# EAGLE board Seeeduino_Arch_V1.0 (EAGLE 6.4)
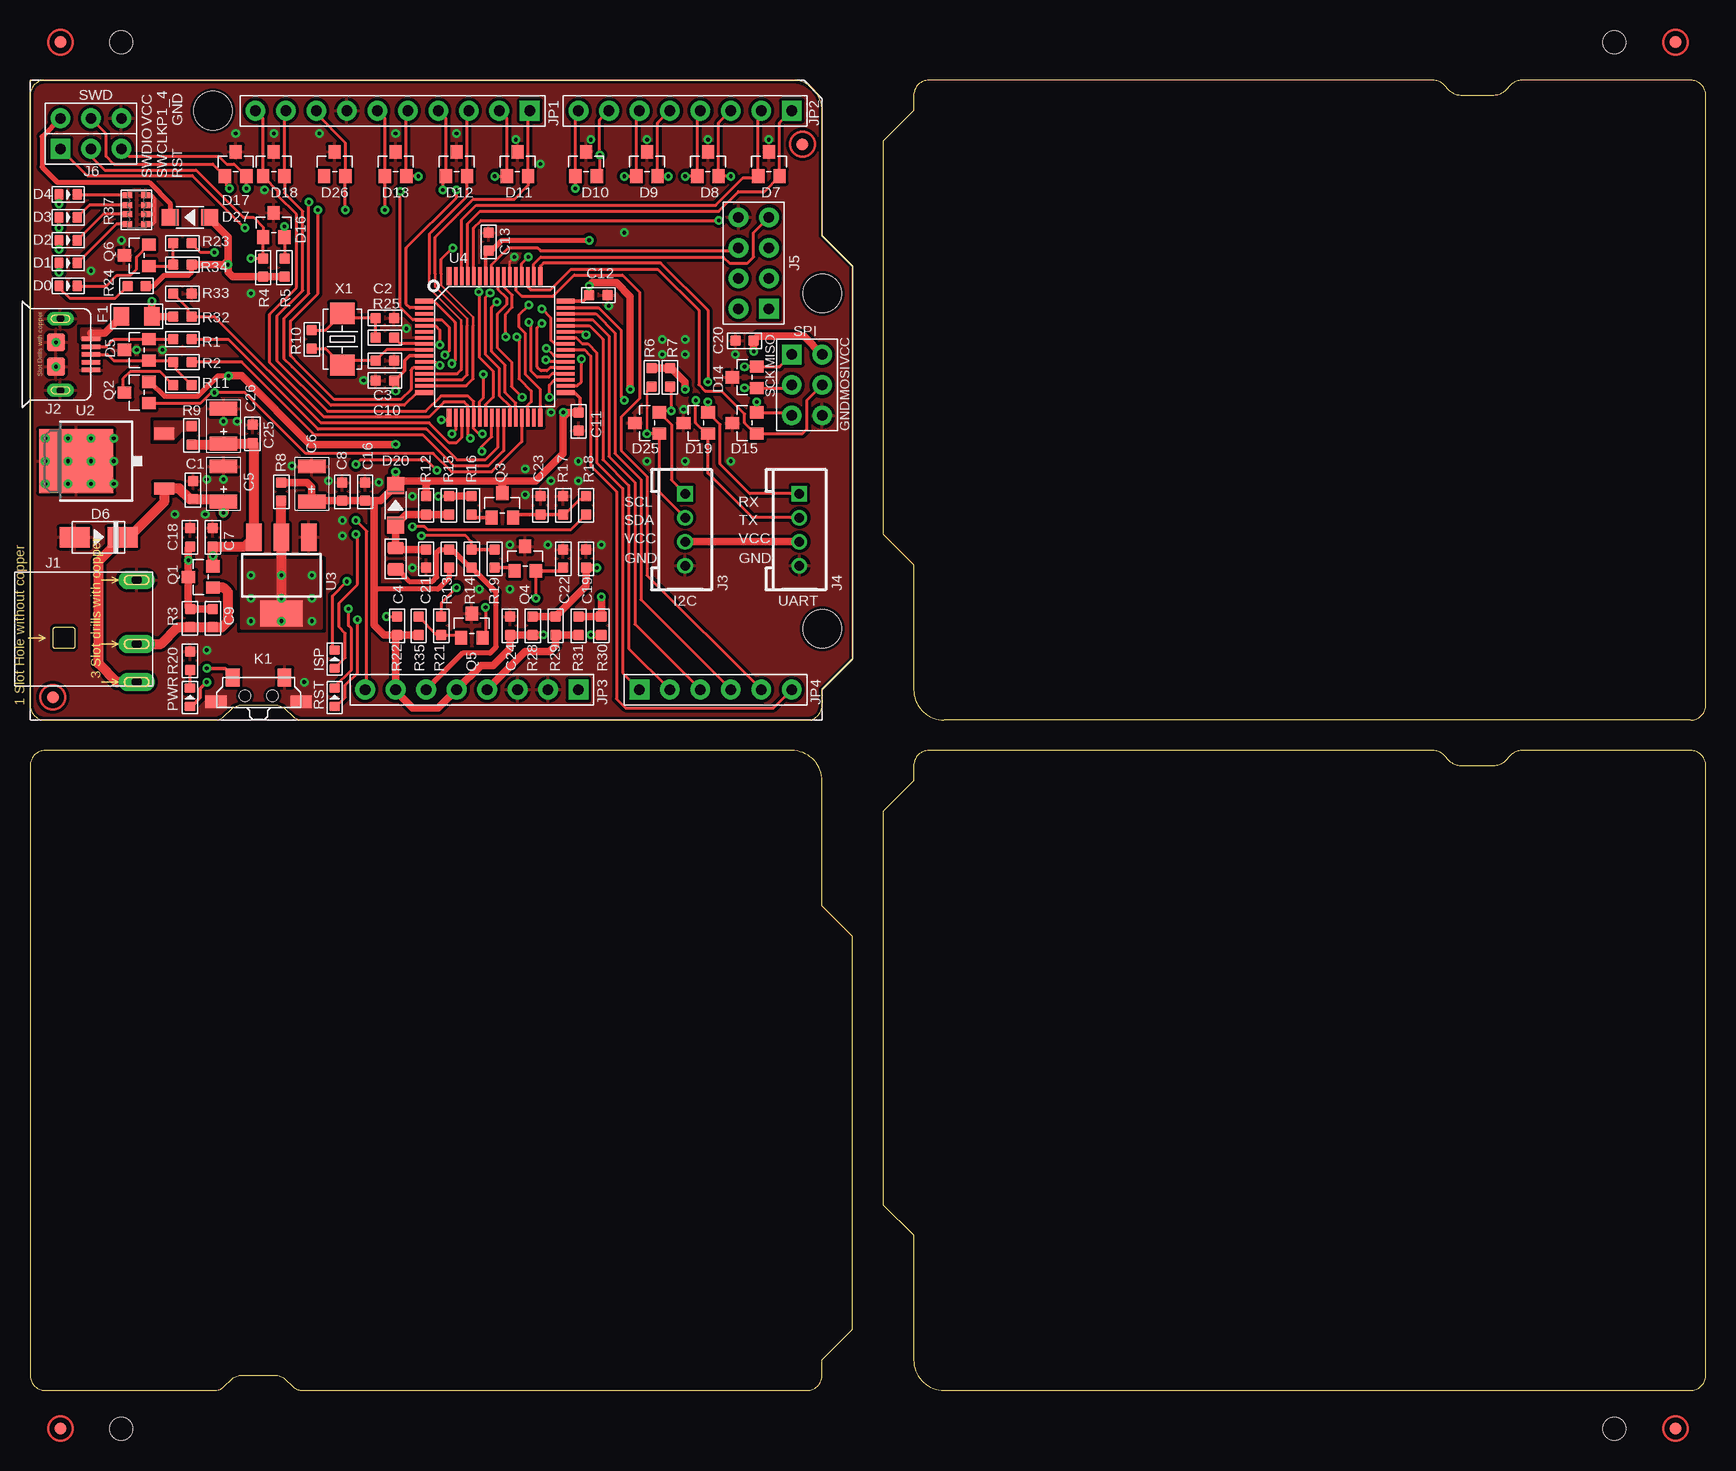
[diagram p0: board, top side]
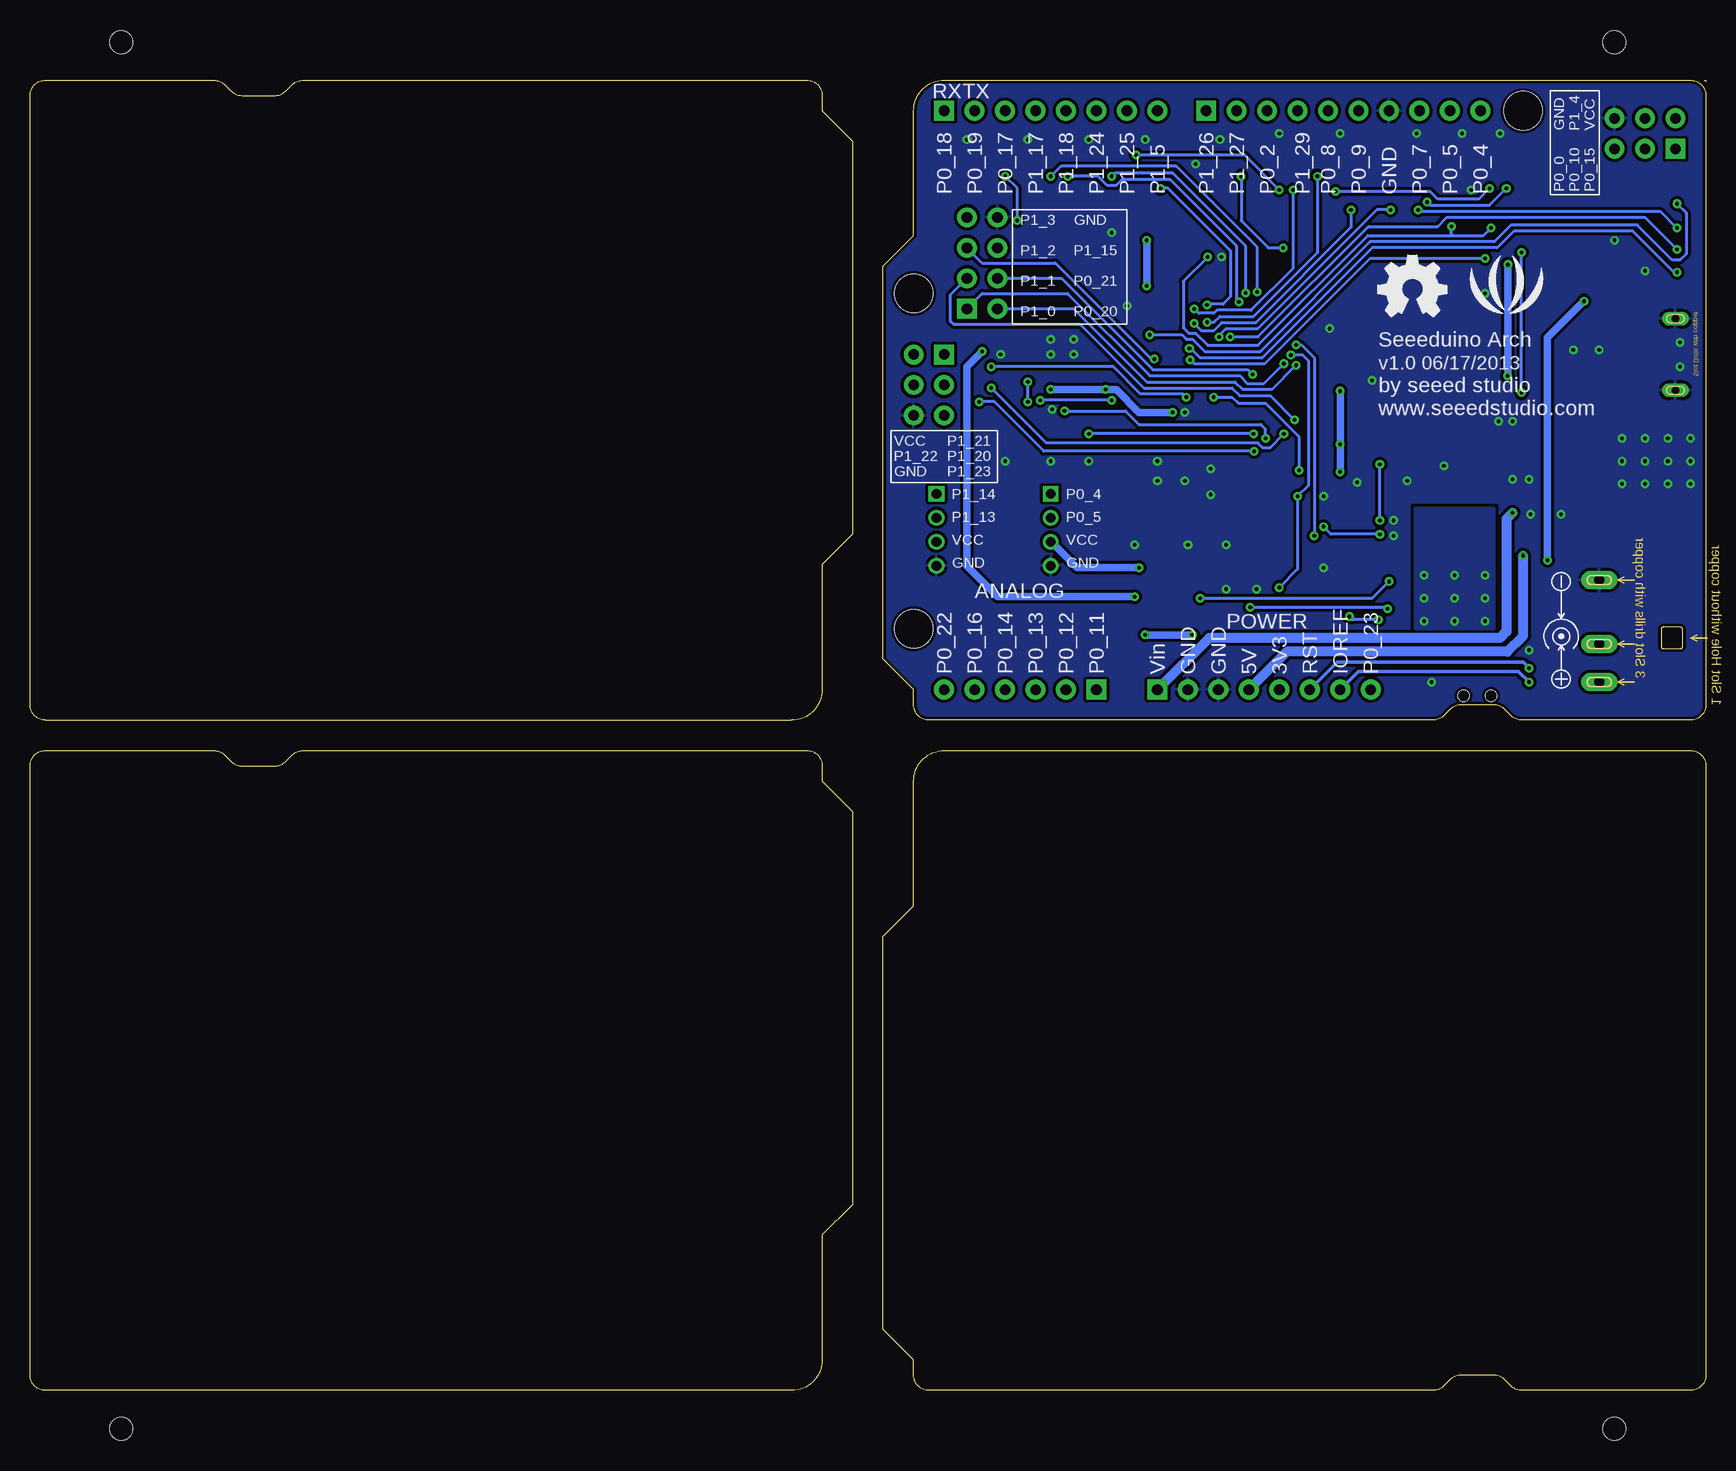
[diagram p1: board, bottom side, seen from below]

Size 139.7 x 109.22 mm. Coordinates in mm from the lower left corner, seen from the top.
Outline: 0,57.15 arc90 1.27,55.88
Outline: 15.35,55.88 arc45 16.25,56.25
Outline: 16.77,56.78 arc-45 17.67,57.15
Outline: 20.43,57.15 arc-45 21.33,56.78
Outline: 21.85,56.25 arc45 22.75,55.88
Outline: 64.77,55.88 arc90 66.04,57.15
Outline: 66.04,106.68 arc90 63.5,109.22
Outline: 1.27,109.22 arc90 0,107.95
Outline: 0,107.95 0,57.15
Outline: 0,57.15 arc90 1.27,55.88
Outline: 1.27,55.88 15.35,55.88
Outline: 15.35,55.88 arc45 16.25,56.25
Outline: 16.25,56.25 16.77,56.78
Outline: 16.77,56.78 arc-45 17.67,57.15
Outline: 17.67,57.15 20.43,57.15
Outline: 20.43,57.15 arc-45 21.33,56.78
Outline: 21.33,56.78 21.85,56.25
Outline: 21.85,56.25 arc45 22.75,55.88
Outline: 22.75,55.88 64.77,55.88
Outline: 64.77,55.88 arc90 66.04,57.15
Outline: 66.04,57.15 66.04,58.42 68.58,60.96 68.58,93.73 66.04,96.27 66.04,106.68
Outline: 66.04,106.68 arc90 63.5,109.22
Outline: 63.5,109.22 1.27,109.22
Outline: 1.27,109.22 arc90 0,107.95
Outline: 0.13,109.22 0,109.22 0,109.09
Outline: 138.43,55.88 arc90 139.7,57.15 139.7,107.95 arc90 138.43,109.22 124.35,109.22 arc45 123.45,108.85 122.93,108.32 arc-45 122.03,107.95 119.27,107.95 arc-45 118.37,108.32 117.85,108.85 arc45 116.95,109.22 74.93,109.22 arc90 73.66,107.95 73.66,106.68 71.12,104.14 71.12,71.37 73.66,68.83 73.66,58.42 arc90 76.2,55.88 138.43,55.88
Outline: 0,52.07 0,1.27 arc90 1.27,0 15.35,0 arc45 16.25,0.37 16.77,0.9 arc-45 17.67,1.27 20.43,1.27 arc-45 21.33,0.9 21.85,0.37 arc45 22.75,0 64.77,0 arc90 66.04,1.27 66.04,2.54 68.58,5.08 68.58,37.85 66.04,40.39 66.04,50.8 arc90 63.5,53.34 1.27,53.34 arc90 0,52.07
Outline: 76.2,0 138.43,0 arc90 139.7,1.27 139.7,52.07 arc90 138.43,53.34 124.35,53.34 arc45 123.45,52.97 122.93,52.44 arc-45 122.03,52.07 119.27,52.07 arc-45 118.37,52.44 117.85,52.97 arc45 116.95,53.34 74.93,53.34 arc90 73.66,52.07 73.66,50.8 71.12,48.26 71.12,15.49 73.66,12.95 73.66,2.54 arc90 76.2,0
Copper layers (1*16): Top 0.035mm / dielectric 1.5mm / Bottom 0.035mm
Design rules "default *": minimum track width 8mil, minimum drill 12mil, track to track 8mil, track to pad 8mil, pad to pad 8mil, via to via 8mil, smd to smd 0mil, copper to edge 10mil, drill to drill 8mil, minimum pad ring 10mil, minimum via ring 8mil, stop-mask expansion 4mil, vias tented up to drill 100mil, thermal gap 10mil
Holes 1.91 mm at 7.62,112.4 132.08,112.4 132.08,-3.17 7.62,-3.17
tRestrict: area 9.4,99.2 to 9.9,99.3; area 9.4,98.4 to 9.9,98.6; area 9.4,97.7 to 9.9,97.8

## Footprints (pad centres in the part's own frame; a part is rotated, then mirrored left to right if it is on the bottom)
C0603 = smd 0.889 x 0.889: 1 -0.762,0; 2 0.762,0
C0805 = smd 1.016 x 1.397: 1 -0.889,0; 2 0.889,0
AVX-B = smd 1.143 x 2.286: + -1.46,0; - 1.46,0
LED-0603 = smd 0.762 x 0.889: + -0.762,0; - 0.762,0
SOT23 = smd 1.016 x 1.143: 1 -0.889,-1.016; 2 0.889,-1.016; 3 0,1.016
SMA = smd 2.5 x 1.7: 1 2,0; 2 -2,0
SOD123 = smd 1.397 x 1.397: + -1.651,0; - 1.651,0
F1206 = smd 1.27 x 1.524: 1 -1.27,0; 2 1.27,0
DC-044 = drill 0.813 pad 1.524 long: + 3.175,10.16; - -5.334,10.16; CDN 0,10.16
MICRO-USB-5P = smd 0.38 x 1.52: 1 -1.3,0; 2 -0.65,0; 3 0,0; 4 0.65,0; 5 1.3,0 | smd 1.524 x 1.524: E1 -1.016,-2.921; E2 1.016,-2.921 | drill 0.635 pad 1.143 long: P1 -2.985,-2.54; P2 2.985,-2.54
4P-2.0 = drill 0.8 pad 1.27 square: 1 -3,0 | drill 0.8 pad 1.27: 2 -1,0; 3 1,0; 4 3,0
2X4P-2.54 = drill 0.889 pad 1.651 square: 1 -1.27,3.81 | drill 0.889 pad 1.651: 2 -1.27,1.27; 3 -1.27,-1.27; 4 -1.27,-3.81; 5 1.27,-3.81; 6 1.27,-1.27; 7 1.27,1.27; 8 1.27,3.81
2X3P-2.54 = drill 0.889 pad 1.651 square: 1 -1.27,2.54 | drill 0.889 pad 1.651: 2 -1.27,0; 3 -1.27,-2.54; 4 1.27,-2.54; 5 1.27,0; 6 1.27,2.54
4P-SMD-7X3.5X3.5H = smd 1.143 x 1.524: 1 -2.159,1.524; 2 2.159,1.524 | smd 1.778 x 1.016: S1 -3.556,-0.508; S2 3.556,-0.508 | hole 0.95: -1.15,0; 1.15,0
ROUND-MARK-1.0 = smd 1.016 x 1.016: P$1 0,0
R0603 = smd 0.889 x 0.889: 1 -0.762,0; 2 0.762,0
1206-8-3.3X2.4 = smd 0.508 x 0.762: 1 -1.206,-0.762; 2 -0.381,-0.762; 3 0.381,-0.762; 4 1.206,-0.762; 5 1.206,0.762; 6 0.381,0.762; 7 -0.381,0.762; 8 -1.206,0.762
ARDUINO-38P = drill 0.889 pad 1.651 square: 1 63.5,50.8; 9 41.656,50.8; 19 50.8,2.54; 25 45.72,2.54; 38 63.5,30.48 | drill 0.889 pad 1.651: 2 60.96,50.8; 3 58.42,50.8; 4 55.88,50.8; 5 53.34,50.8; 6 50.8,50.8; 7 48.26,50.8; 8 45.72,50.8; 10 39.116,50.8; 11 36.576,50.8; 12 34.036,50.8; 13 31.496,50.8; 14 28.956,50.8; 15 26.416,50.8; 16 23.876,50.8; 17 21.336,50.8; 18 18.796,50.8; 20 53.34,2.54; 21 55.88,2.54; 22 58.42,2.54; 23 60.96,2.54; 24 63.5,2.54; 26 43.18,2.54; 27 40.64,2.54; 28 38.1,2.54; 29 35.56,2.54; 30 33.02,2.54; 31 30.48,2.54; 32 27.94,2.54; 33 66.04,30.48; 34 66.04,27.94; 35 66.04,25.4; 36 63.5,25.4; 37 63.5,27.94 | hole 3.2: 15.24,50.8; 66.04,35.56; 66.04,7.62
TO252 = smd 1.016 x 1.651: 1 -2.286,-4.826; 2 2.286,-4.826 | smd 5.3 x 6.2: 3 0,2.5
SOT-223 = smd 1.27 x 2.286: 1 -2.286,-3.175; 2 0,-3.175; 3 2.286,-3.175 | smd 3.556 x 2.159: TER 0,3.175
LQFP64 = smd 1.5 x 0.4: 1 -5.9,3.81; 16 -5.9,-3.81; 33 5.9,-3.81; 48 5.9,3.81 | smd 1.5 x 0.28: 2 -5.9,3.25; 3 -5.9,2.75; 4 -5.9,2.25; 5 -5.9,1.75; 6 -5.9,1.25; 7 -5.9,0.75; 8 -5.9,0.25; 9 -5.9,-0.25; 10 -5.9,-0.75; 11 -5.9,-1.25; 12 -5.9,-1.75; 13 -5.9,-2.25; 14 -5.9,-2.75; 15 -5.9,-3.25; 34 5.9,-3.25; 35 5.9,-2.75; 36 5.9,-2.25; 37 5.9,-1.75; 38 5.9,-1.25; 39 5.9,-0.75; 40 5.9,-0.25; 41 5.9,0.25; 42 5.9,0.75; 43 5.9,1.25; 44 5.9,1.75; 45 5.9,2.25; 46 5.9,2.75; 47 5.9,3.25 | smd 0.4 x 1.5: 17 -3.81,-5.9; 32 3.81,-5.9; 49 3.81,5.9; 64 -3.81,5.9 | smd 0.28 x 1.5: 18 -3.25,-5.9; 19 -2.75,-5.9; 20 -2.25,-5.9; 21 -1.75,-5.9; 22 -1.25,-5.9; 23 -0.75,-5.9; 24 -0.25,-5.9; 25 0.25,-5.9; 26 0.75,-5.9; 27 1.25,-5.9; 28 1.75,-5.9; 29 2.25,-5.9; 30 2.75,-5.9; 31 3.25,-5.9; 50 3.25,5.9; 51 2.75,5.9; 52 2.25,5.9; 53 1.75,5.9; 54 1.25,5.9; 55 0.75,5.9; 56 0.25,5.9; 57 -0.25,5.9; 58 -0.75,5.9; 59 -1.25,5.9; 60 -1.75,5.9; 61 -2.25,5.9; 62 -2.75,5.9; 63 -3.25,5.9
2P-SMD-5X3.2 = smd 1.778 x 2.032: 1 -2.159,0; 2 2.159,0

## Placement (x,y rotation side)
C1  100nF  [C0603]  13.59,75.06 270 top
C2  12pF  [C0603]  29.59,89.41 180 top
C3  12pF  [C0603]  29.59,85.85 180 top
C4  10uF thin  [C0805]  30.48,69.34 90 top
C5  16V 10uF  [AVX-B]  16.13,75.56 90 top
C6  10V 47uF  [AVX-B]  23.5,75.56 90 top
C7  100nF  [C0603]  15.24,71.12 270 top
C8  100nF  [C0603]  26.04,74.93 270 top
C9  DNP  [C0603]  15.24,64.39 90 top
C10  100nF  [C0603]  29.59,84.2 0 top
C11  100nF  [C0603]  45.72,80.77 90 top
C12  100nF  [C0603]  47.37,91.31 180 top
C13  100nF  [C0603]  38.23,95.76 270 top
C16  DNP  [C0603]  27.94,74.93 270 top
C18  100nF  [C0603]  13.34,71.12 270 top
C19  100nF  [C0603]  46.35,69.34 270 top
C20  100nF  [C0603]  59.56,87.5 180 top
C21  100nF  [C0603]  33.02,69.34 90 top
C22  100nF  [C0603]  44.45,69.34 90 top
C23  100nF  [C0603]  42.55,73.79 90 top
C24  100nF  [C0603]  40.01,63.75 270 top
C25  100nF  [C0603]  18.54,79.76 270 top
C26  10V 47uF  [AVX-B]  16.13,80.39 90 top
D0  Green  [LED-0603]  3.17,92.08 0 top
D1  Blue  [LED-0603]  3.17,93.98 0 top
D2  Blue  [LED-0603]  3.17,95.89 0 top
D3  Blue  [LED-0603]  3.17,97.79 0 top
D4  Blue  [LED-0603]  3.17,99.69 0 top
D5  CESD3V3AP  [SOT23]  8.89,86.74 90 top
D6  1N5819  [SMA]  5.71,71.12 0 top
D7  CESD3V3AP  [SOT23]  61.59,102.23 0 top
D8  CESD3V3AP  [SOT23]  56.52,102.23 0 top
D9  CESD3V3AP  [SOT23]  51.44,102.23 0 top
D10  CESD3V3AP  [SOT23]  46.35,102.23 0 top
D11  CESD3V3AP  [SOT23]  40.64,102.23 0 top
D12  CESD3V3AP  [SOT23]  35.56,102.23 0 top
D13  CESD3V3AP  [SOT23]  30.48,102.23 0 top
D14  CESD3V3AP  [SOT23]  59.56,84.45 90 top
D15  CESD3V3AP  [SOT23]  59.56,80.65 90 top
D16  CESD3V3AP  [SOT23]  20.32,97.16 0 top
D17  CESD3V3AP  [SOT23]  17.14,102.23 0 top
D18  CESD3V3AP  [SOT23]  20.32,102.23 0 top
D19  CESD3V3AP  [SOT23]  55.5,80.65 90 top
D20  B5819W  [SOD123]  30.48,73.79 90 top
D25  CESD3V3AP  [SOT23]  51.44,80.65 90 top
D26  CESD3V3AP  [SOT23]  25.4,102.23 0 top
D27  B5819W  [SOD123]  13.34,97.79 180 top
F1  PPTC_500mA  [F1206]  8.89,89.53 0 top
ISP  Green  [LED-0603]  25.4,60.96 90 top
J1  JACK-DC-044  [DC-044]  -1.27,62.23 270 top
J2  USB-MICRO-5P  [MICRO-USB-5P]  5.08,86.36 270 top
J3  [4P-2.0]  54.61,71.75 270 top
J4  [4P-2.0]  64.14,71.75 270 top
J5  [2X4P-2.54]  60.33,93.98 180 top
J6  [2X3P-2.54]  5.08,104.78 90 top
K1  BUTTON-4P-REINFORCE'TS-1188E'  [4P-SMD-7X3.5X3.5H]  19.05,57.91 0 top
P1  [ROUND-MARK-1.0]  64.39,103.89 0 top
P2  [ROUND-MARK-1.0]  1.91,57.79 0 top
P3  [ROUND-MARK-1.0]  2.54,-3.17 0 top  (outside the outline)
P4  [ROUND-MARK-1.0]  2.54,112.4 0 top  (outside the outline)
P5  [ROUND-MARK-1.0]  137.16,112.4 0 top  (outside the outline)
P6  [ROUND-MARK-1.0]  137.16,-3.17 0 top  (outside the outline)
PWR  Green  [LED-0603]  13.34,57.79 90 top
Q1  CJ2305  [SOT23]  14.22,67.82 90 top
Q2  CJ2305  [SOT23]  8.89,83.19 90 top
Q3  S9013  [SOT23]  39.37,73.79 0 top
Q4  S8550  [SOT23]  41.27,69.34 0 top
Q5  S8550  [SOT23]  36.83,63.75 0 top
Q6  S8550  [SOT23]  8.89,94.62 90 top
R1  22R  [R0603]  12.7,87.63 0 top
R2  22R  [R0603]  12.7,85.72 0 top
R3  100k  [R0603]  13.34,64.39 270 top
R4  100k  [R0603]  19.43,93.6 90 top
R5  100k  [R0603]  21.21,93.6 90 top
R6  10k  [R0603]  51.82,84.45 270 top
R7  10k  [R0603]  53.34,84.45 270 top
R8  0R  [R0603]  20.95,74.93 90 top
R9  0R  [R0603]  13.46,79.63 270 top
R10  DNP  [R0603]  23.5,87.63 90 top
R11  1k  [R0603]  12.7,83.82 180 top
R12  10M  [R0603]  33.02,73.79 270 top
R13  1k  [R0603]  34.92,69.34 90 top
R14  1k  [R0603]  36.83,69.34 90 top
R15  1k  [R0603]  34.92,73.79 90 top
R16  100R  [R0603]  36.83,73.79 90 top
R17  100k  [R0603]  44.45,73.79 270 top
R18  100R  [R0603]  46.35,73.79 270 top
R19  100R  [R0603]  38.73,69.34 270 top
R20  1k  [R0603]  13.34,60.83 270 top
R21  1k  [R0603]  34.29,63.75 90 top
R22  1k  [R0603]  30.61,63.75 90 top
R23  1k  [R0603]  12.7,95.63 0 top
R24  1k  [R0603]  8.89,92.08 180 top
R25  0R  [R0603]  29.59,87.76 180 top
R28  DNP  [R0603]  41.91,63.75 270 top
R29  0R  [R0603]  43.81,63.75 270 top
R30  DNP  [R0603]  47.62,63.75 270 top
R31  DNP  [R0603]  45.72,63.75 270 top
R32  1k  [R0603]  12.7,89.53 180 top
R33  100k  [R0603]  12.7,91.44 0 top
R34  100k  [R0603]  12.7,93.85 180 top
R35  DNP  [R0603]  32.38,63.75 90 top
R37  1k  [1206-8-3.3X2.4]  8.89,98.43 90 top
RST  Red  [LED-0603]  25.4,57.79 90 top
U1  [ARDUINO-38P]  0,55.88 0 top
U2  78M05-TO252  [TO252]  6.35,77.47 90 top
U3  LD1117S  [SOT-223]  20.95,67.95 180 top
U4  LPC11U24FBD64/401  [LQFP64]  38.73,87 0 top
U$33  [OSHW_FILLX200_NOTEXT]  27.3,89.53 0 bottom
U$34  [LOGO_SILK]  16.64,91.44 0 bottom
X1  12MHz  [2P-SMD-5X3.2]  26.04,87.63 90 top

## Library data of the parts
C1-C13 C16 C18-C26 D0 D1-D20 D25-D27 F1 ISP K1 PWR Q1-Q6 R1-R25 R28-R35 R37 RST X1 = Discrete
J1-J6 = Connector
P1-P6 = Discrete; PARTNO: DNP
U1 = moudle
U2 U3 = IC
U4 = template
U$33 U$34 = Logo

## Nets
3V3: C6.+ C8.2 C10.2 C11.2 C12.2 C13.2 C16.2 C24.2 D20.- D27.+ PWR.+ Q2.2 Q3.3 R4.1 R5.1 R6.1 R7.1 R8.2 R12.1 R13.1 R22.1 R24.1 R28.2 R30.2 R34.1 R35.1 U1.29 U1.31 U4.10 U4.33 U4.48 U4.58
5V: C7.2 C25.2 C26.+ Q1.2 R9.2 R29.2 R31.2 U1.28 U3.3
EXT_CTR: C9.1 J1.CDN Q1.1 R3.2
G_VCC: C19.2 J3.3 J4.3 R28.1 R29.1
GND: C1.1 C2.1 C3.1 C5.- C6.- C7.1 C8.1 C10.1 C11.1 C12.1 C13.1 C16.1 C18.1 C19.1 C20.2 C21.1 C22.2 C23.2 C24.1 C25.1 C26.- D5.3 D6.2 D7.3 D8.3 D9.3 D10.3 D11.3 D12.3 D13.3 D14.3 D15.3 D16.3 D17.3 D18.3 D19.3 D25.3 D26.3 J1.- J2.5 J2.E1 J2.E2 J2.P1 J2.P2 J3.4 J4.4 J5.5 J6.4 K1.2 K1.S1 K1.S2 Q4.3 Q5.3 Q6.3 R17.1 R20.1 R33.2 R37.1 R37.2 R37.3 R37.4 U1.15 U1.26 U1.27 U1.35 U2.3 U3.1 U4.7 U4.54
N$1: D27.- J6.6
N$2: D4.- R37.5
N$3: Q2.3 R11.2
N$4: Q3.1 R16.1
N$6: C23.1 Q3.2 R17.2 R18.1
N$7: C4.2 C21.2 D20.+ R12.2 R15.1
N$8: PWR.- R20.2
N$9: Q5.1 R21.1 R35.2
N$10: ISP.+ R18.2
N$11: C22.1 ISP.- Q4.2
N$12: Q4.1 R19.2
N$13: Q5.2 RST.-
N$14: R22.2 RST.+
N$15: Q6.1 R23.1 R34.2
N$16: D0.- Q6.2
N$17: D3.- R37.6
N$18: D0.+ R24.2
N$19: D2.- R37.7
N$20: C2.2 R10.2 R25.2 X1.2
N$30: D1.- R37.8
N$31: R8.1 U3.2 U3.TER
N$35: D5.2 J2.2 R1.1
N$36: D5.1 J2.3 R2.1 R11.1
N$38: F1.1 J2.1
N$41: R9.1 U2.2
PIO0_0/RES: D17.2 J6.3 R15.2 R16.2 R21.2 U4.4
PIO0_1: R14.2 R19.1 U4.5
PIO0_2: D12.2 U1.11 U4.13
PIO0_3: R32.1 R33.1 U4.19
PIO0_4: D18.1 D25.2 J3.1 R7.2 U1.18 U4.20
PIO0_5: D18.2 D25.1 J3.2 R6.2 U1.17 U4.21
PIO0_6: Q2.1 R23.2 U4.29
PIO0_7: D26.2 U1.16 U4.30
PIO0_8: D13.2 U1.13 U4.36
PIO0_9: D13.1 U1.14 U4.37
PIO0_10: D16.1 J6.2 R4.2 U4.38
PIO0_11: U1.19 U4.42
PIO0_12: U1.20 U4.44
PIO0_13: U1.21 U4.45
PIO0_14: U1.22 U4.46
PIO0_15: D16.2 J6.1 R5.2 U4.52
PIO0_16: U1.23 U4.53
PIO0_17: D8.2 U1.3 U4.60
PIO0_18: D7.2 U1.1 U4.61
PIO0_19: D7.1 U1.2 U4.62
PIO0_20: J5.8 U4.11
PIO0_21: J5.7 U4.22
PIO0_22: U1.24 U4.40
PIO0_23: U1.32 U4.56
PIO1_0: J5.1 U4.1
PIO1_1: J5.2 U4.17
PIO1_2: J5.3 U4.34
PIO1_3: J5.4 U4.50
PIO1_4: D17.1 J6.5 U4.16
PIO1_5: D10.1 U1.8 U4.32
PIO1_6: U4.64
PIO1_7: U4.6
PIO1_8: D1.+ U4.39
PIO1_9: D2.+ U4.55
PIO1_10: D3.+ U4.12
PIO1_11: D4.+ U4.43
PIO1_12: U4.59
PIO1_13: D19.1 J4.2 U4.47
PIO1_14: D19.2 J4.1 U4.49
PIO1_15: J5.6 U4.57
PIO1_16: U4.63
PIO1_17: D8.1 U1.4 U4.23
PIO1_18: D9.2 U1.5 U4.28
PIO1_19: U4.3
PIO1_20: D14.1 U1.37 U4.18
PIO1_21: D14.2 U1.38 U4.35
PIO1_22: D15.1 U1.34 U4.51
PIO1_23: D15.2 U1.36 U4.24
PIO1_24: D9.1 U1.6 U4.27
PIO1_25: D10.2 U1.7 U4.2
PIO1_26: D11.2 U1.9 U4.14
PIO1_27: D11.1 U1.10 U4.15
PIO1_28: U4.31
PIO1_29: D12.1 U1.12 U4.41
RESET: C4.1 K1.1 R13.2 R14.1 U1.30
S_VCC: C20.1 R30.1 R31.1 U1.33
USB_5V: C9.2 C18.2 F1.2 Q1.3 R3.1 R32.2
USB_DM: R1.2 U4.25
USB_DP: R2.2 U4.26
USB_ID: J2.4
VIN_EXT: C1.2 C5.+ D6.1 J1.+ U1.25 U2.1
XTALIN: R25.1 U4.8
XTALOUT: C3.2 R10.1 U4.9 X1.1

## Tracks (layer width: path | path; a pad name or v marks a point on that pad's centre or on a via)
3V3  (via drill 0.3 pad 0.64)
  Top 0.254: C12.2 v46.61,92.08
  Top 0.305: PWR.+ 13.46,57.02 14.2,57.76 14.2,58.52 v14.73,59.05 | 16.38,93.85 v16.51,93.85 | U4.10 31.64,86.25 31.24,85.85 31.24,85.01 30.43,84.2 C10.2 | U4.33 45.39,83.19 45.85,82.73 45.85,81.66 C11.2 | U4.48 46.1,90.81 C12.2 | U4.58 37.98,94.75 C13.2
  Top 0.406: v46.61,95.89 39.37,95.89 38.48,95 C13.2 | R24.1 10.29,92.08 11.18,92.96 13.21,92.96 13.46,93.22 R34.1 | R13.1 34.92,67.72 34.01,66.8 28.96,66.8 | 28.96,66.8 28.7,66.8 | Q2.2 10.03,84.07 11.22,82.88 13.99,82.88 15.68,84.58 v16.54,84.58 | 28.96,66.8 28.7,67.06 | 28.96,66.8 28.83,66.67
  Top 0.61: v46.61,92.08 46.87,92.34 48.88,92.34 50.04,91.19 v50.04,83.44 | v16.54,84.58 17.65,84.58 23.37,78.87 v30.48,78.87 | D27.+ 14.99,97.66 16.51,96.14 16.51,94.23 | 16.51,94.23 v16.51,93.85 16.51,93.47 | v30.48,76.58 D20.- | R34.1 16.13,93.85 | 16.13,93.85 16.38,93.85 | v30.48,83.31 30.48,84.07 C10.2 | 44.45,81.15 v44.45,81.53 44.83,81.53 | 44.45,81.15 44.45,78.11 42.16,75.82 39.62,75.82 | D20.- 30.48,75.56 30.73,75.82 32.77,75.82 | 32.77,75.82 33.02,75.82 | 33.02,75.82 33.27,75.82 | 33.27,75.82 39.12,75.82 | 39.12,75.82 39.5,75.82 | 39.5,75.82 39.62,75.82 | 39.37,75.56 39.37,75.69 39.5,75.82 | R12.1 33.02,75.56 | 33.02,75.56 33.02,75.82 | R22.1 30.48,62.87 U1.31 30.48,58.29 31.88,56.9 34.04,56.9 U1.29 37.59,60.45 38.61,60.45 40.01,61.85 C24.2 R28.2 v42.8,62.99 | R22.1 R35.1 | R22.1 29.52,62.99 28.7,63.8 28.7,66.8 28.7,67.06 28.7,74.17 | v46.74,62.99 R30.2 | R8.2 23.11,75.69 23.5,75.31 C6.+ 23.56,74.17 C8.2 C16.2 28.7,74.17 | 44.83,81.53 C11.2 | 16.13,93.85 16.51,94.23 | 33.02,75.56 32.77,75.82 | 33.02,75.56 33.27,75.82 | Q3.3 39.37,75.56 | 39.37,75.56 39.12,75.82 | 39.37,75.56 39.62,75.82 | 28.7,74.17 29.21,74.17 D20.- | 44.45,81.15 44.83,81.53 | R5.1 R4.1 16.89,92.84 16.51,93.22 16.51,93.47 | 16.13,93.85 16.51,93.47 | R6.1 R7.1 53.47,85.22 53.59,85.09 53.66,85.03 54.61,84.07 v54.61,83.44
  Bottom 0.305: v14.73,59.05 15.62,59.94 28.96,59.94 U1.31
  Bottom 0.61: v46.61,95.89 v46.61,92.08 | v30.48,76.58 v30.48,78.87 v30.48,83.31 | v16.51,93.85 16.51,84.61 v16.54,84.58 | v44.45,81.53 47.24,81.53 49.15,83.44 v50.04,83.44 v54.61,83.44 | v42.8,62.99 v46.74,62.99
5V  (via drill 0.3 pad 0.64)
  Top 0.61: R31.2 R29.2 43.81,62.1 43.31,61.59 41.27,61.59 U1.28
  Top 0.813: R9.2 16.07,78.87 C26.+ 18.48,78.93 C25.2 18.67,78.87 U3.3 17.91,70.36 C7.2 v15.24,69.6 Q1.2
  Bottom 0.813: U1.28 34.92,61.59 16.55,61.59 15.24,62.9 v15.24,69.6
EXT_CTR
  Top 0.813: J1.CDN 10.92,62.23 12.32,63.63 R3.2 C9.1 16,63.63 16.51,64.14 16.51,66.55 16.13,66.93 Q1.1
G_VCC  (via drill 0.3 pad 0.64)
  Top 0.61: R28.1 R29.1 | R29.1 43.94,64.52 | v47.24,68.58 C19.2 46.35,67.06 R29.1 | J3.3 J4.3
  Bottom 0.61: v47.24,68.58 52.44,68.58 J3.3
GND  (via drill 0.3 pad 0.64)
  Top 0.203: U4.54 39.98,94.09 v40.39,94.49
  Top 0.305: R37.4 10.14,99.63 10.41,99.36 10.41,98.81 | 10.41,98.81 10.41,98.17 | 10.41,98.17 10.41,97.41 10.29,97.28 9.72,97.28 R37.1 | R37.2 10.29,98.04 10.41,98.17 | R37.3 10.41,98.81
  other vias: 48.26,90.42 1.27,79.38 3.17,79.38 5.08,79.38 6.99,79.38 6.99,77.47 5.08,77.47 3.17,77.47 1.27,77.47 1.27,75.56 3.17,75.56 5.08,75.56 6.99,75.56 45.72,77.47 45.72,75.82 43.43,75.82 18.41,91.44 7.62,95.89 8.89,86.74 37.47,66.8 40.01,66.8 31.88,68.58 49.53,96.52 31.37,88.52 27.81,84.2 51.44,77.47 54.61,77.47 58.42,77.47 20.32,104.78 24.13,104.78 30.48,104.78 35.56,104.78 40.51,104.27 46.74,104.27 51.44,104.27 56.52,104.27 61.59,104.27 17.14,104.78 42.55,102.23 2.16,87.38 2.16,85.34 58.8,86.36 41.27,74.68 24.89,75.82 29.08,75.69 21.84,77.09 16.13,75.95 16.13,80.77 17.27,80.77 14.73,75.95 14.61,73.03 12.06,73.03 26.04,71.25 26.04,72.52 14.73,61.72 43.18,70.48 40.01,70.48 47.62,70.48 22.86,59.05 19.56,100.08 11.05,86.74 31.88,74.55 54.48,81.79 5.08,93.34 41.27,76.84 52.7,86.36 43.43,81.53 54.61,86.36 54.61,87.63 52.7,87.63
  pour Bottom (isolate 0.254, rank 6): 0,109.22 68.58,109.22 68.58,55.88 0,55.88
  pour Top (isolate 0.254, rank 6): 0,109.22 68.58,109.22 68.58,55.88 0,55.88
N$1
  Top 0.406: J6.6 1.02,104.52 1.02,101.98 2.29,100.71 9.92,100.71 11.68,98.95 D27.-
N$2
  Top 0.254: R37.5 4,99.63 D4.-
N$3
  Top 0.254: Q2.3 7.75,83.31 7.75,84.33 8.38,84.96 10.79,84.96 R11.2
N$4
  Top 0.305: Q3.1 37.08,72.77 R16.1
N$6
  Top 0.254: R17.2 44.58,73.03 45.85,74.3 46.1,74.3 R18.1
  Top 0.305: R17.2 C23.1 40.51,73.03 Q3.2
N$7
  Top 0.61: R15.1 R12.2 31.37,73.03 D20.+ C4.2 30.61,70.1 C21.2
N$8
  Top 0.254: PWR.- R20.2
N$9
  Top 0.254: Q5.1 35.69,62.99 R21.1 33.91,62.99 R35.2
N$10  (via drill 0.3 pad 0.64)
  Top 0.254: ISP.+ 26.29,61.09 26.29,63.12 25.78,63.63 25.78,65.66 27.3,67.18 27.3,71.25 v27.18,71.37 | 46.23,73.03 R18.2 45.09,71.75 33.15,71.75 32.89,72.01 v31.88,72.01
  Bottom 0.254: v27.18,71.37 31.24,71.37 v31.88,72.01
N$11  (via drill 0.3 pad 0.64)
  Top 0.254: ISP.- 25.4,61.85 25.22,62.03 25.22,66.24 v26.42,67.44 | Q4.2 v42.16,66.04
  Top 0.305: Q4.2 44.2,68.33 C22.1
  Bottom 0.254: v42.16,66.04 27.81,66.04 v26.42,67.44
N$12
  Top 0.305: R19.2 40.13,68.58 Q4.1
N$13  (via drill 0.3 pad 0.64)
  Top 0.254: RST.- 25.4,58.67 26.8,60.07 26.8,63.5 26.54,63.75 v26.54,65.15 | v37.97,65.28 37.97,62.99 Q5.2
  Bottom 0.254: v26.54,65.15 26.67,65.28 v37.97,65.28
N$14  (via drill 0.3 pad 0.64)
  Top 0.254: RST.+ 25.53,57.02 26.29,57.79 26.29,58.8 27.3,59.82 v27.3,64.26 | v29.72,64.52 R22.2
  Bottom 0.254: v27.3,64.26 29.46,64.26 v29.72,64.52
N$15
  Top 0.254: Q6.1 11.81,93.73 R34.2 R23.1
N$16
  Top 0.254: D0.- 6.35,92.08 7.24,92.96 8.38,92.96 8.89,93.47 8.89,94.49 Q6.2
N$17
  Top 0.254: R37.6 4.95,98.81 D3.-
N$18
  Top 0.254: D0.+ 2.41,91.95 3.3,91.06 7.11,91.06 R24.2
N$19
  Top 0.254: R37.7 6.1,98.04 D2.-
N$20
  Top 0.254: R25.2 C2.2 26.42,89.41 X1.2 24.64,88.39 R10.2
N$30
  Top 0.254: R37.8 7.18,97.22 D1.-
N$31  (via drill 0.3 pad 0.64)
  Top 0.813: R8.1 U3.2 U3.TER
  other vias: 23.5,64.14 20.95,64.14 18.41,64.14 18.41,66.04 20.95,66.04 23.5,66.04 23.5,67.95 20.95,67.95 18.41,67.95
  pour Top (no thermals): 17.65,69.22 24.26,69.22 24.26,63.5 17.65,63.5
  pour Bottom (no thermals): 17.65,73.53 24.26,73.53 24.26,63.5 17.65,63.5
N$35
  Top 0.254: R1.1 D5.2 6.99,87.63 6.37,87.01 J2.2
N$36
  Top 0.254: J2.3 6.48,86.36 6.99,85.85 D5.1 11.81,85.85 R2.1 12.19,85.47 12.19,85.09 R11.1
N$38
  Top 0.254: J2.1 5.08,88.14
  Top 0.61: 5.08,88.14 6.22,88.14 F1.1
  pour Top (isolate 0.254, no thermals): 4.32,88.52 5.84,88.52 5.84,87.6 4.32,87.6
N$41
  pour Top (no thermals): 10.41,80.77 13.84,80.77 13.84,80.01 12.7,80.01 11.94,79.25 10.41,79.25
PIO0_0/RES  (via drill 0.3 pad 0.64)
  Top 0.254: v30.86,99.95 30.86,90.3 31.91,89.25 U4.4 34.33,89.25 34.92,88.65 34.92,86.64 v34.59,86.31 | v34.04,74.55 R15.2 | v35.56,66.93 34.29,65.66 R21.2 | J6.3 8.26,102.87 15.75,102.87 16.38,102.23 17.02,102.23 D17.2 v18.03,100.2
  Top 0.61: R15.2 R16.2
  Bottom 0.254: v34.59,86.31 33.6,86.31 33.15,85.85 33.15,75.44 v34.04,74.55 34.04,68.45 v35.56,66.93 | v30.86,99.95 22.99,99.95 22.35,99.31 18.92,99.31 v18.03,100.2
PIO0_1  (via drill 0.3 pad 0.64)
  Top 0.254: U4.5 33.81,88.75 34.16,88.39 v34.16,87.17 | R14.2 36.83,70.74 36.32,71.25 v32.64,71.25
  Top 0.305: R14.2 R19.1
  Bottom 0.254: v34.16,87.17 33.71,87.17 32.64,86.11 v32.64,71.25
PIO0_2
  Top 0.203: 33.27,93.09 33.27,91.89 35.94,89.22 35.94,88.77
  Top 0.254: U4.13 35.61,84.75 35.94,85.08 35.94,88.77 | U1.11 36.45,106.55 D12.2 36.45,99.57 33.27,96.39 33.27,93.09
PIO0_3
  Top 0.254: U4.19 35.98,79.44 35.52,78.97 34.95,78.97 33.27,80.65 24.26,80.65 15.37,89.53 R32.1 13.46,89.66 13.21,89.92 13.21,90.17 12.19,91.19 12.19,91.31 12.06,91.44 R33.1
PIO0_4  (via drill 0.3 pad 0.64)
  Top 0.254: J3.1 53.47,75.9 53.47,80.52 D25.2 52.32,81.66 v53.47,81.66 53.47,83.57 R7.2 | U1.18 19.43,106.05 D18.1 20.7,99.95 20.7,99.57 22.22,98.05 22.22,91.94 19.99,89.72 19.99,85.67 24.52,81.15 33.27,81.15 34.51,82.39 36.21,82.39 36.48,82.11 U4.20 36.48,79.59 v36.7,79.38
  Bottom 0.254: v36.7,79.38 36.7,80.14 37.08,80.52 47.24,80.52 48.39,81.66 v53.47,81.66
PIO0_5  (via drill 0.3 pad 0.64)
  Top 0.203: v51.44,79.76 51.44,83.31 R6.2
  Top 0.254: J3.2 52.45,74.91 D25.1 v51.44,79.76 | U1.17 21.21,106.55 D18.2 21.34,101.09 21.21,101.09 21.21,99.82 22.73,98.3 22.73,91.69 20.58,89.54 20.58,85.86 24.8,81.63 32.99,81.63 34.26,82.9 36.52,82.9 36.98,82.44 U4.21 36.98,80.17 37.4,79.76 v37.72,79.76
  Bottom 0.254: v37.72,79.76 v51.44,79.76
PIO0_6  (via drill 0.3 pad 0.64)
  Top 0.254: U4.29 40.98,79.09 38.48,76.58 35.13,76.58 33.6,78.11 22.99,78.11 17.91,83.19 v15.37,83.19 15.11,83.19 14.22,82.3 Q2.1 | 13.72,95.63 R23.2 14.22,94.87 v15.37,94.87
  Bottom 0.254: v15.37,83.19 v15.37,94.87
PIO0_7  (via drill 0.3 pad 0.64)
  Top 0.254: U4.30 41.48,82.12 41.78,82.42 41.78,83.31 40.77,84.33 40.77,87.63 v40.58,87.82 | v26.29,98.43 D26.2 26.29,104.01 23.88,106.43 U1.16
  Bottom 0.254: v40.58,87.82 40.58,87.95 40.01,88.52 37.34,88.52 27.43,98.43 v26.29,98.43
PIO0_8  (via drill 0.3 pad 0.64)
  Top 0.254: v32.38,101.22 D13.2 31.37,106.55 U1.13 | U4.36 43.53,84.75 43.24,84.45 42.29,84.45 41.78,84.96 41.78,88.85 v41.58,89.05
  Bottom 0.254: v41.58,89.05 41,89.05 40.51,89.53 37.72,89.53 32.38,94.87 v32.38,101.22
PIO0_9  (via drill 0.3 pad 0.64)
  Top 0.254: v29.59,98.43 D13.1 29.59,106.05 U1.14 | U4.37 43.34,85.25 43.09,85 42.62,85 42.29,85.32 42.29,88.58 v42.67,88.96
  Bottom 0.254: v42.67,88.96 42.03,88.32 41.05,88.32 40.35,89.03 37.53,89.03 29.59,96.96 v29.59,98.43
PIO0_10  (via drill 0.3 pad 0.64)
  Top 0.254: J6.2 5.08,102.87 6.22,101.73 13.84,101.73 17.78,97.79 18.63,97.79 19.43,96.99 D16.1 R4.2 v18.41,94.36 | U4.38 43.16,85.75 v42.99,85.92
  Bottom 0.254: v42.99,85.92 42.67,85.6 36.77,85.6 28,94.36 v18.41,94.36
PIO0_11
  Top 0.254: U1.19 49.4,59.82 49.4,75.18 47.24,77.34 47.24,86.51 46.5,87.25 46.04,87.25 45.54,87.75 U4.42
PIO0_12
  Top 0.254: U4.44 46.63,88.75 47.75,87.62 47.75,77.6 49.91,75.44 49.91,61.85 U1.20
PIO0_13
  Top 0.254: U4.45 46.91,89.25 48.26,87.89 48.26,77.85 50.42,75.69 50.42,63.88 U1.21
PIO0_14
  Top 0.254: U4.46 47.17,89.75 48.77,88.15 48.77,78.11 50.93,75.95 50.93,65.91 U1.22
PIO0_15  (via drill 0.3 pad 0.64)
  Top 0.254: J6.1 4.78,101.27 13.54,101.27 v17.91,96.9 | R5.2 D16.2 v21.21,97.03 | U4.52 40.98,93.94 v41.53,94.49
  Bottom 0.254: 21.34,96.27 28.19,96.27 37.34,87.12 41.53,87.12 42.55,88.14 43.1,88.14 43.56,88.6 43.56,92.46 v41.53,94.49 | 21.34,96.27 21.21,96.27 | 21.21,96.27 21.08,96.27 | 21.08,96.27 18.54,96.27 v17.91,96.9 | 21.21,96.27 21.21,96.39 | 21.21,96.39 v21.21,97.03 | 21.21,96.39 21.08,96.27 | 21.21,96.39 21.34,96.27
PIO0_16
  Top 0.254: U1.23 51.44,67.95 51.44,76.2 49.28,78.36 49.28,81.15 50.8,82.68 50.8,91.57 49.38,92.99 45.36,92.99 43.6,91.23 40.98,91.23 40.48,91.72 U4.53
PIO0_17  (via drill 0.3 pad 0.64)
  Top 0.254: U4.60 36.98,96.92 37.6,97.54 v57.4,97.54 | v58.42,101.22 D8.2 57.4,105.66 U1.3
  Bottom 0.254: v57.4,97.54 57.4,100.2 v58.42,101.22
PIO0_18
  Top 0.254: U4.61 36.48,97.27 37.52,98.3 57.4,98.3 59.05,99.95 61.21,99.95 D7.2 62.48,105.66 U1.1
PIO0_19
  Top 0.254: U4.62 35.98,97.6 37.19,98.81 57.15,98.81 59.44,101.09 60.58,101.09 D7.1 60.71,106.43 U1.2
PIO0_20  (via drill 0.3 pad 0.64)
  Top 0.254: U4.11 33.76,85.75 34.04,85.47 v34.16,85.47
  Bottom 0.254: J5.8 52.7,90.17 46.61,84.07 39.24,84.07 38.61,83.44 36.2,83.44 v34.16,85.47
PIO0_21  (via drill 0.3 pad 0.64)
  Top 0.254: v37.78,84.71 37.78,82.74 37.48,82.44 U4.22
  Bottom 0.254: v37.78,84.71 38.16,85.09 46.1,85.09 53.72,92.71 J5.7
PIO0_22
  Top 0.254: U4.40 46.22,86.75 46.74,86.23 46.74,77.09 48.9,74.93 48.9,57.66 49.66,56.9 61.98,56.9 U1.24
PIO0_23  (via drill 0.3 pad 0.64)
  Top 0.254: v41.02,82.8 40.13,83.69 40.13,85.72 38.94,86.91 38.94,89.74 39.71,90.51 39.71,91.1 38.98,91.83 U4.56 | U1.32 28.07,58.55 28.07,71.63 v27.18,72.52 | v27.18,77.22 27.56,77.6 33.02,77.6 v33.91,76.71
  Bottom 0.254: v41.02,82.8 39.5,82.8 38.99,82.3 36.7,82.3 33.91,79.5 v33.91,76.71 | v27.18,72.52 v27.18,77.22
PIO1_0  (via drill 0.3 pad 0.64)
  Top 0.254: U4.1 33.67,90.81 35.43,89.04 35.43,85.85 v35.18,85.6
  Bottom 0.254: J5.1 60.33,91.44 53.21,91.44 46.35,84.58 38.86,84.58 38.23,83.95 36.83,83.95 v35.18,85.6
PIO1_1  (via drill 0.3 pad 0.64)
  Top 0.254: 34.87,81.15 U4.17 34.73,80.9 v34.29,80.9
  Bottom 0.254: J5.2 62.99,91.31 62.99,89.15 62.74,88.9 52.2,88.9 46.86,83.57 39.5,83.57 38.86,82.93 36.32,82.93 v34.29,80.9
PIO1_2  (via drill 0.3 pad 0.64)
  Top 0.254: U4.34 45.65,83.75 45.97,84.07 v45.97,85.98
  Bottom 0.254: J5.3 60.33,93.98 54.23,93.98 46.23,85.98 v45.97,85.98
PIO1_3
  Top 0.254: J5.4 60.33,96.52 60.33,94.49 59.82,93.98 58.29,93.98 57.78,94.49 42.58,94.49 41.98,93.9 U4.50
PIO1_4  (via drill 0.3 pad 0.64)
  Top 0.254: U4.16 32.26,83.19 31.2,82.12 25.07,82.12 21.84,85.35 21.16,86.03 21.16,89.36 23.24,91.44 v23.24,99.06 | J6.5 6.35,104.78 6.35,102.87 6.99,102.23 15.24,102.23 D17.1 16.38,101.09 16.38,100.46 v16.64,100.2
  Bottom 0.254: v16.64,100.2 18.04,98.8 22.98,98.8 v23.24,99.06
PIO1_5  (via drill 0.3 pad 0.64)
  Top 0.254: U4.32 42.55,83.44 41.27,84.71 41.27,88.14 40.77,88.65 40.77,89.66 v41.59,90.49 | v45.47,100.2 D10.1 45.47,106.43 U1.8
  Bottom 0.254: v45.47,100.2 44.83,100.2 39.62,95 39.62,91.19 40.26,90.55 41.53,90.55 v41.59,90.49
PIO1_8  (via drill 0.3 pad 0.64)
  Top 0.254: v2.41,93.22 D1.+ | U4.39 43.68,86.25 v43.05,86.87
  Bottom 0.254: v2.41,93.22 2.67,93.22 6.1,96.65 16,96.65 17.4,95.25 27.81,95.25 36.96,86.11 42.16,86.11 42.93,86.87 v43.05,86.87
PIO1_9  (via drill 0.3 pad 0.64)
  Top 0.254: v2.41,95.12 D2.+ | v39.65,87.83 39.65,89.74 40.2,90.29 40.2,91.31 39.48,92.02 U4.55
  Bottom 0.254: v2.41,95.12 5.08,97.79 21.59,97.79 22.35,97.03 28.13,97.03 37.33,87.83 v39.65,87.83
PIO1_10  (via drill 0.3 pad 0.64)
  Top 0.254: U4.12 31.95,85.25 31.75,85.05 31.75,83.44 30.91,82.6 25.36,82.6 22.35,85.61 21.72,86.25 21.72,89.15 24,91.44 v24,98.43 | v2.41,96.9 D3.+
  Bottom 0.254: v2.41,96.9 3.81,98.3 23.88,98.3 v24,98.43
PIO1_11  (via drill 0.3 pad 0.64)
  Top 0.254: v2.41,98.93 D4.+ | U4.43 46.12,88.25 v46.35,88.01
  Bottom 0.254: v46.35,88.01 43.69,88.01 43.31,87.63 42.8,87.63 41.78,86.61 37.15,86.61 28,95.76 17.65,95.76 16.26,97.16 5.71,97.16 2.79,94.23 2.16,94.23 1.65,94.74 1.65,98.17 v2.41,98.93
PIO1_13  (via drill 0.3 pad 0.64)
  Top 0.254: U4.47 47.4,90.25 49.28,88.37 49.28,82.8 v49.53,82.55 | J4.2 60.21,72.75 56.52,76.45 D19.1 56.39,79.76 55.5,80.65 v55.5,82.55
  Bottom 0.254: v49.53,82.55 v55.5,82.55
PIO1_14  (via drill 0.3 pad 0.64)
  Top 0.254: J4.1 59.99,74.75 57.53,77.22 57.53,80.52 D19.2 | 42.6,92.84 U4.49 42.55,93.73 42.8,93.98 52.58,93.98 56.52,90.04 v56.52,84.07 | 56.26,81.79 D19.2 | D19.2 v56.52,82.42
  Bottom 0.254: v56.52,82.42 v56.52,84.07
PIO1_15
  Top 0.254: U4.57 38.48,93.86 39.88,95.25 42.29,95.25 42.55,95 58.8,95 J5.6
PIO1_17  (via drill 0.3 pad 0.64)
  Top 0.254: U4.23 37.97,81.11 37.97,82.17 38.61,82.8 38.61,84.96 37.47,86.11 37.47,91.5 v37.4,91.57 | v54.61,101.22 D8.1 55.63,106.43 U1.4
  Bottom 0.254: v54.61,101.22 53.77,102.06 44.14,102.06 37.4,95.31 v37.4,91.57
PIO1_18  (via drill 0.3 pad 0.64)
  Top 0.254: U4.28 40.48,82.32 39.62,83.19 39.62,85.47 38.48,86.61 38.48,90.3 v38.92,90.74 | v53.21,101.22 D9.2 52.32,105.66 U1.5
  Bottom 0.254: v53.21,101.22 50.67,101.22 49.89,100.43 49.17,100.43 48.69,100.91 44.65,100.91 39.12,95.38 39.12,90.93 v38.92,90.74
PIO1_20  (via drill 0.3 pad 0.64)
  Top 0.254: U1.37 63.25,83.57 D14.1 v59.56,83.57 | U4.18 35.48,80.06 v35.18,79.76
  Bottom 0.254: v35.18,79.76 36.32,78.61 36.96,78.61 37.34,78.99 54.99,78.99 v59.56,83.57
PIO1_21  (via drill 0.3 pad 0.64)
  Top 0.254: U1.38 62.48,85.34 D14.2 v59.56,85.34 | U4.35 43.73,84.25 43.31,83.82 v43.31,82.8
  Bottom 0.254: v43.31,82.8 43.56,83.06 47.12,83.06 49.4,85.34 v59.56,85.34
PIO1_22
  Top 0.254: U1.34 64.77,82.55 64.77,80.14 64.39,79.76 D15.1 60.45,79.76 59.56,80.65 59.56,81.41 57.66,83.31 56.28,83.31 55.75,83.84 55.75,90.04 52.32,93.47 45.1,93.47 43.38,91.76 41.72,91.76 41.48,91.99 U4.51
PIO1_23  (via drill 0.3 pad 0.64)
  Top 0.254: U1.36 63.25,81.53 D15.2 v60.58,82.42 | v37.66,78.3 37.66,78.68 38.48,79.5 U4.24
  Bottom 0.254: v37.66,78.3 55.18,78.3 59.31,82.42 v60.58,82.42
PIO1_24  (via drill 0.3 pad 0.64)
  Top 0.254: U4.27 40.01,81.12 40.01,82.04 39.12,82.93 39.12,85.22 37.97,86.36 37.97,91.12 v38.35,91.5 | v49.53,101.22 D9.1 50.55,106.43 U1.6
  Bottom 0.254: v49.53,101.22 49.29,101.46 44.44,101.46 38.35,95.38 v38.35,91.5
PIO1_25  (via drill 0.3 pad 0.64)
  Top 0.254: U4.2 31.68,90.25 31.37,90.55 31.37,95.25 35.56,99.44 v35.56,100.08 | 47.24,101.35 D10.2 47.5,101.47 v47.5,103 47.5,105.92 U1.7
  Bottom 0.254: v35.56,100.08 38.48,103 v47.5,103
PIO1_26
  Top 0.203: 33.78,93.09 33.78,92.01 36.45,89.34 36.45,88.77
  Top 0.254: U4.14 36.03,84.25 36.45,84.67 36.45,88.77 | U1.9 41.53,106.55 D11.2 41.53,100.46 40.39,99.31 36.96,99.31 33.78,96.14 33.78,93.09
PIO1_27  (via drill 0.3 pad 0.64)
  Top 0.203: 34.29,93.09 34.29,92.14 36.96,89.47 36.96,88.77
  Top 0.254: U4.15 36.36,83.75 36.96,84.34 36.96,88.77 | U1.10 39.75,106.05 D11.1 v38.73,101.22 | 34.29,93.09 34.29,94.3 v35.24,95.25
  Bottom 0.254: v38.73,101.22 38.73,97.51 36.47,95.25 v35.24,95.25
PIO1_29  (via drill 0.3 pad 0.64)
  Top 0.254: U4.41 43.74,87.25 43.43,87.56 43.43,89.41 v42.67,90.17 | U1.12 34.67,106.05 D12.1 34.42,100.97 v34.42,100.08
  Bottom 0.254: 42.55,90.04 v42.67,90.17 42.29,89.79 41.02,89.79 40.77,90.04 37.91,90.04 34.42,93.54 v34.42,100.08
RESET  (via drill 0.3 pad 0.64)
  Top 0.305: K1.1 16.89,59.56 16.26,60.2 v14.73,60.2
  Top 0.406: C4.1 30.61,68.45 31.62,67.44 33.55,67.44 33.91,67.8 33.91,69.85 34.16,70.1 R13.2 35.18,70.1 36.7,68.58 R14.1 38.86,66.55 38.86,61.98 38.35,61.47 36.07,61.47 U1.30
  Bottom 0.305: v14.73,60.2 15.24,60.71 30.73,60.71 U1.30
S_VCC  (via drill 0.3 pad 0.64)
  Top 0.61: U1.33 64.52,87.88 60.71,87.88 C20.1 v60.33,86.61 | R31.1 R30.1 v47.62,66.17
  Bottom 0.61: v60.33,86.61 61.61,85.33 61.61,68.72 59.05,66.17 v47.62,66.17
USB_5V  (via drill 0.3 pad 0.64)
  Top 0.61: R32.2 F1.2 v10.16,90.81 | C18.2 13.21,70.23 v13.21,69.22 Q1.3 13.21,65.28 R3.1 C9.2
  Bottom 0.61: v13.21,69.22 13.21,87.76 v10.16,90.81
USB_DM
  Top 0.254: U4.25 38.98,78.61 37.97,77.6 35.59,77.6 33.05,80.14 24,80.14 16.51,87.63 R1.2
USB_DP
  Top 0.254: U4.26 39.48,78.35 38.23,77.09 35.33,77.09 32.79,79.63 23.75,79.63 17.65,85.72 R2.2
VIN_EXT  (via drill 0.3 pad 0.64)
  Top 0.813: C5.+ 15.94,74.1 | C5.+ 15.81,74.1 | J1.+ 7.24,59.05 5.71,60.58 5.71,69.12 D6.1 8.26,71.12 11.18,74.04 U2.1 12.45,75.18 13.34,74.3 C1.2 15.94,74.3 C5.+ | C5.+ v16.13,73.15
  Bottom 0.813: v16.13,73.15 16.64,72.64 16.64,63.25 17.14,62.74 41.4,62.74 U1.25
XTALIN
  Top 0.254: U4.8 30.86,87.25 R25.1
XTALOUT
  Top 0.254: U4.9 29.72,86.75 C3.2 26.42,85.85 X1.1 24.64,86.87 R10.1

## Text on the board
tPlace: SWD | VCC | P1_4 | GND | JP1 | JP2 | SWDIO | SWCLK | RST | SPI | VCC | MISO | SCK | MOSI | GND | SCL | RX | SDA | TX | VCC | VCC | GND | GND | I2C | UART | JP3 | JP4
bPlace: TX | RX | VCC | P1_4 | GND | P0_15 | P0_10 | P0_0 | P0_4 | P0_5 | P0_7 | GND | P0_9 | P0_8 | P1_29 | P0_2 | P1_27 | P1_26 | P1_5 | P1_25 | P1_24 | P1_18 | P1_17 | P0_17 | P0_19 | P0_18 | GND | P1_3 | P1_15 | P1_2 | P0_21 | P1_1 | P0_20 | P1_0 | Seeeduino Arch | v1.0 06/17/2013 | by seeed studio | www.seeedstudio.com | P1_21 | VCC | P1_20 | P1_22 | P1_23 | GND | P0_4 | P1_14 | P0_5 | P1_13 | VCC | VCC | GND | GND | ANALOG | POWER | P0_23 | IOREF | RST | 3V3 | 5V | GND | GND | Vin | P0_11 | P0_12 | P0_13 | P0_14 | P0_16 | P0_22